# EAGLE board Stick IMUinator (EAGLE 5.11)
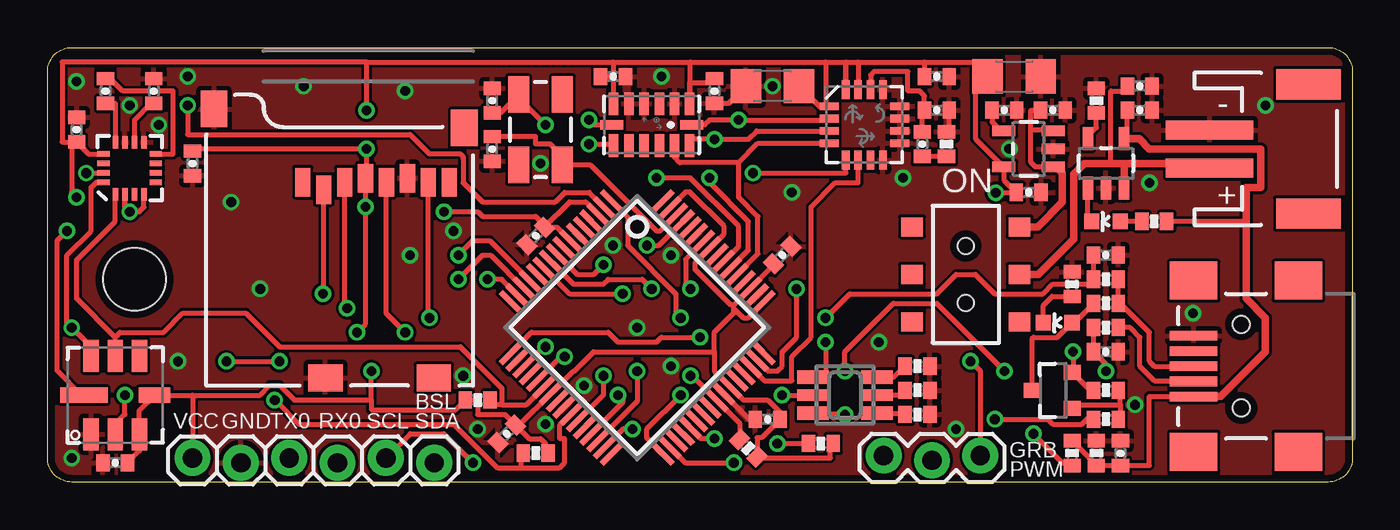
[diagram p0: board, top side]
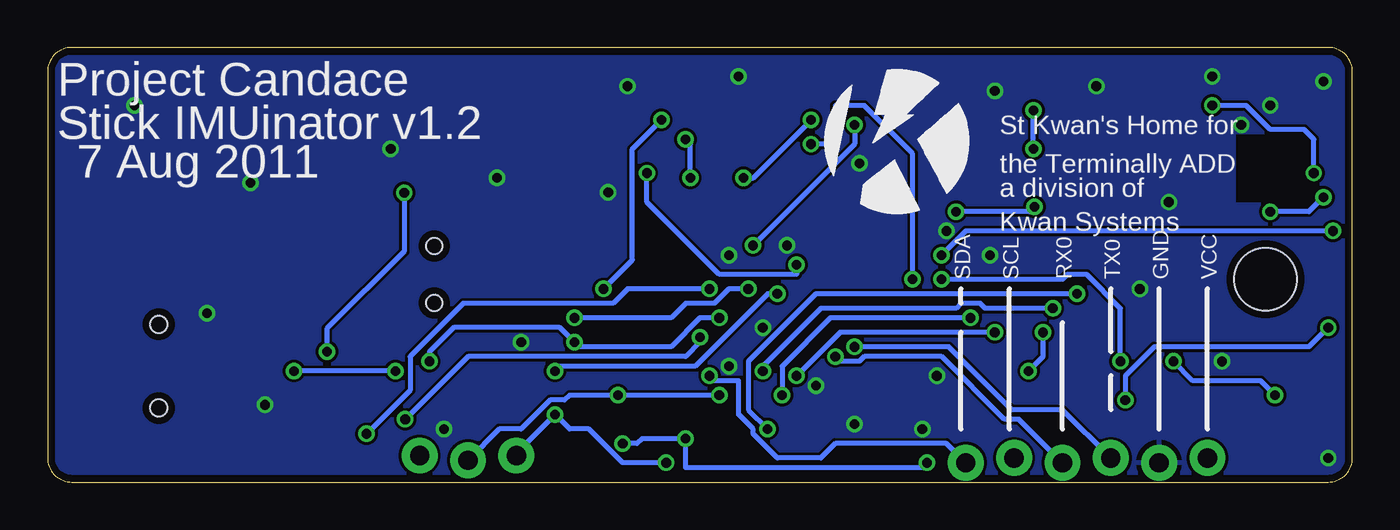
[diagram p1: board, bottom side, seen from below]

Size 68.58 x 22.86 mm. Coordinates in mm from the lower left corner, seen from the top.
Outline: 1.27,22.86 67.31,22.86 arc-90 68.58,21.59 68.58,1.27 arc-90 67.31,0 1.27,0 arc-90 0,1.27 0,21.59 arc-90 1.27,22.86
Copper layers (1*16): Top 0.0356mm / dielectric 1.5011mm / Bottom 0.0356mm
Design rules "LaenPCBOrder *": minimum track width 6mil, minimum drill 13mil, track to track 6mil, track to pad 6mil, pad to pad 6mil, via to via 6mil, smd to smd 6mil, copper to edge 15mil, drill to drill 6mil, minimum pad ring 7mil, minimum via ring 7mil, stop-mask expansion 4mil, vias tented up to drill 0mil, thermal gap 10mil
Net classes: 0 default: width 0.152 mm, drill 0.33 mm, clearance 0.152 mm; 1 power: width 0.152 mm, drill 0.33 mm, clearance 0.152 mm to class 0, clearance 0.152 mm; 2 hv: width 0.152 mm, drill 0.33 mm, clearance 0.152 mm to class 0, clearance 0.152 mm to class 1, clearance 0.152 mm
tRestrict: area 2.5,14.7 to 6.1,17.5; area 2.5,17.5 to 3.8,18.3; area 5.6,17.5 to 6.1,18.3
bRestrict: area 2.5,14.7 to 6.1,18.3

## Footprints (pad centres in the part's own frame; a part is rotated, then mirrored left to right if it is on the bottom)
0402-CAP = smd 0.7 x 0.9: 1 -0.65,0; 2 0.65,0
1206 = smd 1.6 x 1.8: 1 -1.4,0; 2 1.4,0
LED-0603 = smd 0.8 x 0.8: A 0,-0.75; C 0,0.75
GM5WA94310A = smd 0.7 x 1.65: 1 -0.95,-1.675; 3 0.95,-1.675; 4 0.95,1.675; 6 -0.95,1.675 | smd 0.6 x 1.65: 2 0,-1.675; 5 0,1.675
USB-MINIB = smd 2.5 x 0.5: D+ 2.5,0; D- 2.5,0.8; GND 2.5,-1.6; ID 2.5,-0.8; VBUS 2.5,1.6 | smd 2.5 x 2: MTN1 -3,4.5; MTN2 2.5,4.5; MTN3 -3,-4.5; MTN4 2.5,-4.5 | hole 0.9: 0,2.2; 0,-2.2
JST-2-SMD = smd 1 x 4.6: 1 -1,-3.7; 2 1,-3.7 | smd 1.6 x 3.4: NC1 -3.4,1.5; NC2 3.4,1.5
1X06_LOCK = drill 1.016 pad 1.88 round: 1 0,0; 2 2.54,-0.254; 3 5.08,0; 4 7.62,-0.254; 5 10.16,0; 6 12.7,-0.254
1X03_LOCK = drill 1.016 pad 1.88 round: 1 0,0.127; 2 2.54,-0.127; 3 5.08,0.127
STAND-OFF = hole 3.302: 0,0
SOT23-3 = smd 0.8 x 0.9: 1 -0.95,-1; 2 0.95,-1; 3 0,1.1
0402-RES = smd 0.7 x 0.9: 1 -0.65,0; 2 0.65,0
AYZ0202 = smd 1 x 1.15: 1 -2.5,2.825; 2 0,2.825; 3 2.5,2.825; 4 -2.5,-2.825; 5 0,-2.825; 6 2.5,-2.825 | hole 0.85: 1.5,0; -1.5,0
BMP085 = smd 1.67 x 0.8: 1 -2.065,1.27; 2 -2.065,0; 3 -2.065,-1.27; 5 2.065,-1.27; 6 2.065,0; 7 2.065,1.27 | smd 0.8 x 1.67: 4 0,-2.065 | smd 0.8 x 2.5: 8 0,1.65
SOT23-5 = smd 0.55 x 1.2: 1 -0.95,-1.3; 2 0,-1.3; 3 0.95,-1.3; 4 0.95,1.3; 5 -0.95,1.3
SQFP-S-10X10-64 = smd 0.3 x 1.6: 1 -3.75,-5.6; 2 -3.25,-5.6; 3 -2.75,-5.6; 4 -2.25,-5.6; 5 -1.75,-5.6; 6 -1.25,-5.6; 7 -0.75,-5.6; 8 -0.25,-5.6; 9 0.25,-5.6; 10 0.75,-5.6; 11 1.25,-5.6; 12 1.75,-5.6; 13 2.25,-5.6; 14 2.75,-5.6; 15 3.25,-5.6; 16 3.75,-5.6; 33 3.75,5.6; 34 3.25,5.6; 35 2.75,5.6; 36 2.25,5.6; 37 1.75,5.6; 38 1.25,5.6; 39 0.75,5.6; 40 0.25,5.6; 41 -0.25,5.6; 42 -0.75,5.6; 43 -1.25,5.6; 44 -1.75,5.6; 45 -2.25,5.6; 46 -2.75,5.6; 47 -3.25,5.6; 48 -3.75,5.6 | smd 1.6 x 0.3: 17 5.6,-3.75; 18 5.6,-3.25; 19 5.6,-2.75; 20 5.6,-2.25; 21 5.6,-1.75; 22 5.6,-1.25; 23 5.6,-0.75; 24 5.6,-0.25; 25 5.6,0.25; 26 5.6,0.75; 27 5.6,1.25; 28 5.6,1.75; 29 5.6,2.25; 30 5.6,2.75; 31 5.6,3.25; 32 5.6,3.75; 49 -5.6,3.75; 50 -5.6,3.25; 51 -5.6,2.75; 52 -5.6,2.25; 53 -5.6,1.75; 54 -5.6,1.25; 55 -5.6,0.75; 56 -5.6,0.25; 57 -5.6,-0.25; 58 -5.6,-0.75; 59 -5.6,-1.25; 60 -5.6,-1.75; 61 -5.6,-2.25; 62 -5.6,-2.75; 63 -5.6,-3.25; 64 -5.6,-3.75
LGA16-4X4 = smd 1 x 0.4: 1 -1.85,0.975; 2 -1.85,0.325; 3 -1.85,-0.325; 4 -1.85,-0.975; 9 1.85,-0.975; 10 1.85,-0.325; 11 1.85,0.325; 12 1.85,0.975 | smd 0.4 x 1: 5 -0.975,-1.85; 6 -0.325,-1.85; 7 0.325,-1.85; 8 0.975,-1.85; 13 0.975,1.85; 14 0.325,1.85; 15 -0.325,1.85; 16 -0.975,1.85
LGA14 = smd 0.5 x 1.2: 1 2,1.1; 2 1.2,1.1; 3 0.4,1.1; 4 -0.4,1.1; 5 -1.2,1.1; 6 -2,1.1; 8 -2,-1.1; 9 -1.2,-1.1; 10 -0.4,-1.1; 11 0.4,-1.1; 12 1.2,-1.1; 13 2,-1.1 | smd 1.2 x 0.5: 7 -2.1,0; 14 2.1,0
MICRO-SD-SOCKET-PP = smd 0.8 x 1.5: 1 -8.94,10.7; 2 -7.84,10.3; 3 -6.74,10.7; 4 -5.64,10.9; 5 -4.54,10.7; 6 -3.44,10.9; 7 -2.34,10.7; 8 -1.24,10.7 | smd 1.8 x 1.4: CD1 -2.05,0.4; CD2 -7.75,0.4 | smd 1.4 x 1.9: GND1 -13.6,14.55; GND3 -0.45,13.55
16LPCC = smd 0.65 x 0.28: 1 -1.37,0.75; 2 -1.37,0.25; 3 -1.37,-0.25; 4 -1.37,-0.75; 9 1.37,-0.75; 10 1.37,-0.25; 11 1.37,0.25; 12 1.37,0.75 | smd 0.28 x 0.65: 5 -0.75,-1.37; 6 -0.25,-1.37; 7 0.25,-1.37; 8 0.75,-1.37; 13 0.75,1.37; 14 0.25,1.37; 15 -0.25,1.37; 16 -0.75,1.37
CRYSTAL-SMD-5X3 = smd 1.9 x 1.1: 1 -1.85,-1.15; 2 1.85,-1.15; 3 1.85,1.15; 4 -1.85,1.15

## Placement (x,y rotation side)
C002  0.1uF  [0402-CAP]  56.39,1.52 90 top
C003  22pF  [0402-CAP]  55.63,11.94 0 top
C004  22pF  [0402-CAP]  55.63,6.86 0 top
C101  0.1uF  [0402-CAP]  3.56,1.02 180 top
C201  10uF  [1206]  50.8,21.34 0 top
C202  0.1uF  [0402-CAP]  51.56,15.24 0 top
C203  0.1uF  [0402-CAP]  50.29,19.56 0 top
C204  4.7uF  [0402-CAP]  52.83,19.56 0 top
C301  4.7uF  [0402-CAP]  57.4,20.83 0 top
C302  4.7uF  [0402-CAP]  57.4,19.56 0 top
C407  0.1uF  [0402-CAP]  25.65,12.95 225 top
C423  0.1uF  [0402-CAP]  24.13,2.54 225 top
C443  0.1uF  [0402-CAP]  37.85,3.3 180 top
C451  0.1uF  [0402-CAP]  38.61,11.94 45 top
C461  22pF  [0402-CAP]  23.37,20.07 270 top
C462  22pF  [0402-CAP]  23.37,17.53 90 top
C501  0.1uF  [0402-CAP]  46.74,21.34 0 top
C502  10uF  [1206]  38.1,20.83 180 top
C503  0.01uF  [0402-CAP]  46.74,19.56 0 top
C504  0.47uF  [0402-CAP]  45.97,17.78 270 top
C601  0.1uF  [0402-CAP]  35.05,20.57 270 top
C606  4.7uF  [0402-CAP]  29.72,21.34 0 top
C701  0.1uF  [0402-CAP]  7.62,16.76 270 top
C802  0.1uF  [0402-CAP]  1.52,18.54 90 top
C808  0.22uF  [0402-CAP]  3.05,20.57 270 top
C810  4.7uF  [0402-CAP]  5.59,20.57 90 top
D002  RED  [LED-0603]  53.09,8.38 90 top
D301  GREEN  [LED-0603]  55.63,13.72 90 top
D401  GM5WA94310A  [GM5WA94310A]  41.91,4.57 270 top
J001  USBSMD  [USB-MINIB]  62.74,6.1 180 top
J301  JST 2mm  [JST-2-SMD]  64.77,17.53 270 top
J401  M06  [1X06_LOCK]  7.62,1.27 0 top
J402  M03  [1X03_LOCK]  43.94,1.27 0 top
JP1  STAND-OFF  [STAND-OFF]  4.57,10.67 0 top
Q001  PNP  [SOT23-3]  52.86,4.83 90 top
R008  10k  [0402-RES]  53.85,1.52 90 top
R009  33  [0402-RES]  55.63,10.67 0 top
R010  33  [0402-RES]  55.63,8.13 0 top
R011  1.5k  [0402-RES]  55.63,9.4 0 top
R012  1k  [0402-RES]  55.63,3.3 0 top
R013  10k  [0402-RES]  55.63,4.83 180 top
R014  100k  [0402-RES]  55.12,1.52 270 top
R015  330  [0402-RES]  53.85,10.41 270 top
R301  2.2k  [0402-RES]  55.12,20.07 270 top
R302  330  [0402-RES]  58.17,13.72 0 top
R404  47  [0402-RES]  45.72,4.83 180 top
R405  4.7  [0402-RES]  45.72,3.56 180 top
R406  10  [0402-RES]  45.72,6.1 180 top
R422  10k  [0402-RES]  22.61,4.32 180 top
R426  10k  [0402-RES]  25.65,1.52 0 top
R437  10k  [0402-RES]  40.64,2.03 0 top
R441  10k  [0402-RES]  36.83,1.78 315 top
R501  10k  [0402-RES]  47.24,17.78 270 top
S201  SPST  [AYZ0202]  48.26,10.92 270 top
U101  BMP085  [BMP085]  3.56,4.57 90 top
U201  V_REG  [SOT23-5]  51.56,17.53 90 top
U301  73831  [SOT23-5]  55.63,16.76 0 top
U401  LPC2148  [SQFP-S-10X10-64]  30.99,8.13 225 top
U501  L3G4200D  [LGA16-4X4]  42.93,18.8 0 top
U601  ADXL345  [LGA14]  31.75,18.8 0 top
U701  USD-SOCKETNEW  [MICRO-SD-SOCKET-PP]  22.35,5.08 0 top
U801  5883  [16LPCC]  4.32,16.51 90 top
Y401  12MHz  [CRYSTAL-SMD-5X3]  25.91,18.54 270 top

## Library data of the parts
C002-C004 C101 C201-C204 C301 C302 C407 C423 C443 C451 C461 C462 C501-C504 C601 C606 C701 C802 C808 C810 D002 D301 J001 J301 J401 J402 JP1 Q001 R008 R009 R010-R015 R301 R302 R404-R406 R422 R426 R437 R441 R501 S201 U101 U201 U301 U401 U501 U601 U701 U801 Y401 = SparkFun
D401 = led

## Nets
ACCINT: U401.15 U601.8
COMPINT: U401.2 U801.15
CS0: U401.31 U701.2
CSA: U401.55 U601.7
CSG: U401.9 U501.5
EOC: U101.2 U401.14
GND [power]: C002.2 C003.2 C004.2 C101.2 C201.2 C202.2 C203.2 C204.2 C301.2 C302.2 C407.2 C423.2 C443.2 C451.2 C461.1 C462.1 C501.2 C502.2 C503.2 C601.2 C606.2 C701.2 C802.2 C810.2 J001.GND J301.1 J401.2 R014.1 R015.1 R301.1 R404.1 R405.1 R406.1 R501.1 U101.1 U201.2 U301.2 U401.6 U401.18 U401.25 U401.42 U401.50 U401.59 U501.8 U501.9 U501.10 U501.11 U501.12 U501.13 U601.2 U601.4 U601.5 U701.6 U701.CD2 U701.GND1 U801.9 U801.11
GYROINT: U401.46 U501.6
MISO0: U401.29 U701.7
MISO1: U401.53 U501.4 U601.12
MOSI0: U401.30 U701.3
MOSI1: U401.54 U501.3 U601.13
N$1: J001.D- R010.2
N$2: R301.2 U301.5
N$3: J001.D+ R009.2 R011.2
N$4: D301.C U301.1
N$5: D301.A R302.1
N$6: D002.A Q001.3 R011.1
N$7: D002.C R015.2
N$9: Q001.1 R012.2 R013.1
N$11: D401.5 R404.2
N$12: D401.6 R406.2
N$13: D401.4 R405.2
N$14: C808.1 U801.8
N$15: C808.2 U801.12
N$16: C810.1 U801.10
N$17: C203.1 U201.4
N$20: C503.1 C504.1 U501.14
N$21: C504.2 R501.2
PWMB: D401.1 J402.3 U401.1
PWMG: D401.3 J402.1 U401.34
PWMR: D401.2 J402.2 U401.33
RAW: C204.1 S201.1 U201.1 U201.3
RX0: J401.4 U401.21
SCK0: U401.27 U701.5
SCK1: U401.47 U501.2 U601.14
SCL0: R422.1 U101.6 U401.22 U801.1
SCL1: J401.5 R437.1 U401.37
SDA0: R426.1 U101.7 U401.26 U801.16
SDA1: J401.6 R441.1 U401.41
TX0: J401.3 U401.19
USB_LIGHT: R012.1 U401.17
USB_ON: R008.1 U401.58
USB_VIN: C002.1 C302.1 J001.VBUS R008.2 R014.2 R302.2 U301.4
USBD+: C003.1 R009.1 U401.10
USBD-: C004.1 R010.1 U401.11
VCC [power]: C101.1 C201.1 C202.1 C407.1 C423.1 C443.1 C451.1 C501.1 C502.1 C601.1 C606.1 C701.1 C802.1 J401.1 Q001.2 R013.2 R422.2 R426.2 R437.2 R441.2 U101.3 U101.4 U201.5 U401.3 U401.7 U401.23 U401.43 U401.49 U401.51 U401.57 U401.63 U501.1 U501.15 U501.16 U601.1 U601.6 U701.4 U801.2 U801.4 U801.13
VLIPO: C301.1 J301.2 S201.2 U301.3
XCLR: U101.8 U401.13
XTAL1: C462.2 U401.62 Y401.3
XTAL2: C461.2 U401.61 Y401.1

## Tracks (layer width: path | path; a pad name or v marks a point on that pad's centre or on a via)
ACCINT  (via drill 0.51)
  Top 0.254: U401.15 23.88,10.64 23.88,10.67 v23.11,10.67 | U601.8 29.67,17.78 v28.45,17.78
  Bottom 0.254: v28.45,17.78 27.69,17.78 27.18,18.29 27.18,19.81 25.65,19.81 23.11,17.27 v23.11,10.67
COMPINT  (via drill 0.51)
  Top 0.254: U801.15 v2.04,16.26 v2.03,16.26 | U401.2 28.47,15.24 27.18,15.24 26.67,14.73 22.86,14.73 21.84,15.75 21.84,17.02 arc90 21.59,17.27 20.07,17.27 19.05,18.29 7.37,18.29 v7.37,19.81
  Bottom 0.254: v2.03,16.26 2.03,18.03 2.54,18.54 4.32,18.54 5.59,19.81 v7.37,19.81
CS0  (via drill 0.51)
  Top 0.254: U401.31 30.25,2.79 v30.73,2.79 | U701.2 14.51,9.94 v14.48,9.91
  Bottom 0.254: v14.48,9.91 28.19,9.91 31.75,6.35 31.75,3.81 v30.73,2.79
CSA  (via drill 0.51)
  Top 0.254: v32,16 33.78,16 36.32,13.46 36.32,12.4 U401.55 | U601.7 28.7,18.8 v28.45,19.05
  Bottom 0.254: v28.45,19.05 31.5,16 v32,16
CSG  (via drill 0.51)
  Top 0.254: U401.9 27.84,10.92 28.7,10.92 v29.21,11.43 | U501.5 41.95,16.26 v37.08,16.26
  Bottom 0.254: v29.21,11.43 29.21,10.92 33.27,10.92 37.08,14.73 v37.08,16.26
EOC  (via drill 0.51)
  Top 0.254: U401.14 23.29,11.94 22.86,11.94 v21.59,10.67 | U101.2 3.56,3.05 4.06,3.56 v4.06,4.57 | v9.4,6.35 v12.19,6.35
  Bottom 0.254: v21.59,10.67 15.24,10.67 14.99,10.92 13.97,10.92 12.19,9.14 v12.19,6.35 | v4.06,4.57 4.83,5.33 8.38,5.33 v9.4,6.35
GND  (via drill 0.51)
  Top 0.254: R501.1 47.39,18.57 C503.2 | C601.2 35.8,19.92 C502.2 | 36.41,3.76 U401.42 36.88,3.3 C443.2
  other vias: 64.01,19.81 60.2,8.89 57.15,4.06 4.32,19.81 11.18,10.16 5.84,18.8 1.52,21.08 39.12,15.24 44.96,16 47.75,2.79 30.99,8.13 32.26,21.34 32.77,6.1 21.34,13.21 32.77,11.94 26.16,3.05 9.65,14.73 13.46,20.83 29.72,12.45 38.1,20.83 7.37,21.34 18.8,20.57 25.91,16.76 6.86,6.35 28.19,5.08 43.69,7.37 19.05,11.94 22.61,2.79 50.55,17.53 21.84,5.59 1.27,1.27 57.91,15.75
  pour Top: 1.27,22.86 67.31,22.86 arc-90 68.58,21.59 68.58,1.27 arc-90 67.31,0 1.27,0 arc-90 0,1.27 0,21.59 arc-90
  pour Bottom: 1.27,22.86 67.31,22.86 arc-90 68.58,21.59 68.58,1.27 arc-90 67.31,0 1.27,0 arc-90 0,1.27 0,21.59 arc-90
GYROINT
  Top 0.254: U401.46 37.67,5.33 39.12,5.33 39.12,6.6 40.13,7.62 40.13,14.48 41.4,15.75 42.6,15.75 U501.6
MISO0  (via drill 0.51)
  Top 0.254: U401.29 30.23,4.18 30.23,4.32 v29.97,4.57 | U701.7 20.01,8.69 v20.07,8.64
  Bottom 0.254: v20.07,8.64 27.43,8.64 29.97,6.1 v29.97,4.57
MISO1
  Top 0.254: U601.12 32.95,17.09 33.23,16.8 36.32,16.8 | U401.53 37.34,12 37.34,13.97 36.32,14.99 36.32,16.8 | U501.4 37.34,17.82 36.32,16.8
MOSI0  (via drill 0.51)
  Top 0.254: v30.99,5.84 30.99,4.24 U401.30 | U701.3 15.61,9.28 v15.75,9.14
  Bottom 0.254: v30.99,5.84 30.99,6.1 27.94,9.14 20.83,9.14 20.57,9.4 19.56,9.4 19.3,9.14 v15.75,9.14
MOSI1  (via drill 0.51)
  Top 0.254: U601.13 33.75,18.03 v35.05,18.03 36.83,18.03 37.27,18.47 U501.3 | U401.54 36.83,12.2 36.83,13.72 34.8,15.75 v34.8,16
  Bottom 0.254: v34.8,16 34.8,17.78 v35.05,18.03
N$1
  Top 0.254: R010.2 56.9,8.13 57.4,7.62 57.4,6.1 58.17,5.33 60.2,5.33 J001.D-
N$2
  Top 0.254: U301.5 54.61,18.13 55.12,18.64 R301.2
N$3
  Top 0.254: R009.2 R011.2 56.39,9.4 57.91,7.87 57.91,6.35 58.17,6.1 J001.D+
N$4
  Top 0.254: U301.1 54.68,13.72 D301.C
N$5
  Top 0.254: R302.1 D301.A
N$6
  Top 0.254: R011.1 53.96,8.38 D002.A 53.07,7.62 51.82,7.62 51.76,7.56 Q001.3
N$7
  Top 0.254: D002.C 52.34,9.3 52.8,9.76 R015.2
N$9
  Top 0.254: R013.1 56.28,4.94 56.39,4.83 56.39,4.06 | R012.2 56.39,3.3 56.39,4.06 | 56.39,4.06 53.77,4.06 53.86,3.97 Q001.1
N$11
  Top 0.254: D401.5 44.82,4.57 R404.2
N$12
  Top 0.254: D401.6 44.5,5.52 R406.2
N$13
  Top 0.254: D401.4 45,3.62 R405.2
N$14
  Top 0.254: U801.8 6.6,17.26 6.6,20.57 3.95,20.57 3.3,21.22 C808.1
N$15
  Top 0.254: C808.2 3.57,19.92 U801.12
N$16
  Top 0.254: U801.10 4.57,19.05 5.45,19.92 C810.1
N$17
  Top 0.254: C203.1 49.64,18.94 50.04,18.54 50.2,18.54 U201.4
N$20
  Top 0.254: C504.1 45.97,19.45 C503.1 46.09,20.32 45.83,20.57 45.21,20.57 45.21,21.59 43.43,21.59 43.25,21.41 U501.14
N$21
  Top 0.254: R501.2 C504.2
PWMB  (via drill 0.51)
  Top 0.254: D401.1 40.64,5.52 arc90 40.89,5.78 v40.89,7.37 | v33.27,8.64 33.02,8.89 33.02,9.91 30.48,12.45 30.48,13.94 U401.1 | v48.51,6.35 49.02,5.84 J402.3
  Bottom 0.254: v33.27,8.64 34.29,8.64 35.81,7.11 40.64,7.11 v40.89,7.37 41.66,8.13 47.24,8.13 48.51,6.86 v48.51,6.35 | J402.3 49.02,1.27
PWMG  (via drill 0.51)
  Top 0.254: U401.34 33.5,1.02 v36.07,1.02 | D401.3 40.3,3.56 v41.91,3.56
  Bottom 0.254: v36.07,1.02 38.35,1.02 40.13,2.79 41.15,2.79 v41.91,3.56 43.94,1.52 J402.1 43.94,1.27
PWMR  (via drill 0.51)
  Top 0.254: 31.75,2.03 32.27,1.52 U401.33 31.5,2.32 31.5,2.79 v33.27,4.57 | v38.61,4.57 D401.2
  Bottom 0.254: v33.27,4.57 v38.61,4.57 41.15,4.57 41.4,4.32 42.16,4.32 43.69,2.79 44.83,2.79 J402.2
RAW
  Top 0.254: 51.67,18.54 51.67,16.83 51.93,16.58 U201.1 | 51.67,18.54 51.67,19.56 C204.1 | U201.3 52.8,18.54 51.67,18.54
  Top 0.406: S201.1 52.03,13.42 53.34,14.73 53.34,16.26 53.02,16.58 U201.1
RX0  (via drill 0.51)
  Top 0.254: U401.21 26.99,6.6 v27.18,6.6
  Bottom 0.254: v27.18,6.6 26.92,6.35 25.91,6.35 25.65,6.6 21.59,6.6 18.29,3.3 17.53,3.3 J401.4
SCK0  (via drill 0.51)
  Top 0.254: v29.21,5.59 29.21,4.58 U401.27 | v18.8,7.87 17.81,8.86 U701.5
  Bottom 0.254: v18.8,7.87 26.92,7.87 v29.21,5.59
SCK1  (via drill 0.51)
  Top 0.254: v39.37,10.16 39.37,7.62 38.61,6.86 38.61,6.1 38.35,5.84 37.87,5.84 U401.47 | U501.2 41.01,19.05 v36.32,19.05 34.8,19.05 34.54,18.8 U601.14
  Bottom 0.254: v39.37,10.16 37.85,11.68 37.85,17.53 v36.32,19.05
SCL0
  Top 0.254: U401.22 25.16,4.06 23.88,4.06 | U801.1 3.56,15.13 3.56,13.72 1.52,11.68 1.52,9.65 3.56,7.62 | 23.88,4.06 23.88,4.94 21.7,7.11 12.19,7.11 10.41,8.89 7.11,8.89 6.1,7.87 3.81,7.87 3.56,7.62 | 23.88,4.06 23.51,4.06 arc-90 R422.1 | U101.6 3.56,7.62
SCL1  (via drill 0.51)
  Top 0.254: v22.35,1.02 20.83,2.54 19.05,2.54 J401.5 | v35.05,2.29 34.35,2.29 U401.37 | v38.35,2.03 R437.1
  Bottom 0.254: v22.35,1.02 22.61,0.76 35.05,0.76 v35.05,2.29 37.34,2.29 37.59,2.03 v38.35,2.03
SDA0  (via drill 0.51)
  Top 0.254: U801.16 2.55,15.76 2.29,15.49 2.29,13.21 1.02,11.94 1.02,8.38 v1.27,8.13 2.29,7.11 U101.7 | U401.26 26.92,3 26.92,2.29 27.18,2.29 27.18,1.02 26.92,0.76 24.89,0.76 | v11.94,4.32 13.21,3.05 21.34,3.05 23.62,0.76 24.89,0.76 | R426.1 24.89,1.41 24.89,0.76
  Bottom 0.254: v11.94,4.32 11.94,5.59 10.41,7.11 2.29,7.11 v1.27,8.13
SDA1  (via drill 0.51)
  Top 0.254: R441.1 36.37,3.1 U401.41 33.88,5.59 v33.78,5.59
  Bottom 0.254: v33.78,5.59 33.53,5.33 32.26,5.33 32.26,3.56 31.5,2.79 31.5,2.54 30.23,1.27 27.94,1.27 27.18,2.03 21.34,2.03 J401.6
TX0  (via drill 0.51)
  Top 0.254: U401.19 26.08,7.11 v26.16,7.11
  Bottom 0.254: v26.16,7.11 21.21,7.11 17.91,3.81 15.24,3.81 J401.3
USB_LIGHT  (via drill 0.51)
  Top 0.254: R012.1 54.61,3.3 54.36,3.05 52.83,3.05 52.58,3.3 v49.78,3.3 | v34.29,7.62 32.26,7.62 32,7.37 29.97,7.37 29.46,7.87 25.43,7.87 U401.17
  Bottom 0.254: v34.29,7.62 34.29,7.37 35.05,6.6 46.48,6.6 v49.78,3.3
USB_ON  (via drill 0.51)
  Top 0.254: v51.82,2.54 53.34,1.02 53.71,1.02 R008.1 | v33.78,10.16 33.53,10.41 33.53,11.73 U401.58
  Bottom 0.254: v51.82,2.54 49.53,4.83 49.53,6.6 46.74,9.4 38.86,9.4 38.1,10.16 v33.78,10.16
USB_VIN
  Top 0.254: R008.2 55.12,0.9 R014.2 C002.1 57.91,0.87 57.91,4.5 J001.VBUS | U301.4 56.5,18.14 56.75,18.14 C302.1 | 62.99,13.72 R302.2
  Top 0.406: J001.VBUS 61.65,4.5 64.01,6.86 64.01,8.64 62.99,9.65 62.99,13.72 62.99,15.49 63.75,15.49 63.75,17.53 57.91,17.53 57.37,18.06 U301.4
USBD+  (via drill 0.51)
  Top 0.254: R009.1 55.01,10.67 | R009.1 55.12,10.67 | 26.54,11.56 U401.10 27.64,10.41 29.21,10.41 29.46,10.67 31.24,10.67 v31.75,10.16 | R009.1 C003.1 | v40.89,8.64 42.16,9.91 46.74,9.91 47.75,10.92 48.77,10.92 49.78,9.91 52.32,9.91 52.83,10.41 54.72,10.41 R009.1 | R009.1 54.98,10.41
  Bottom 0.254: v31.75,10.16 32.77,10.16 33.53,9.4 35.05,9.4 35.81,8.64 v40.89,8.64
USBD-  (via drill 0.51)
  Top 0.254: v55.63,5.84 55.63,6.21 C004.1 R010.1 | v30.23,9.91 27.44,9.91 U401.11 | v41.91,5.84 41.91,6.86 44.45,9.4 46.74,9.4 v50.29,5.84
  Bottom 0.254: v50.29,5.84 v55.63,5.84 | v30.23,9.91 30.73,9.91 34.54,6.1 41.91,6.1 v41.91,5.84
VCC  (via drill 0.51)
  Top 0.254: 54.98,4.89 R013.2 54.81,4.83 Q001.2 53.9,5.78 v53.9,6.86 | 4.07,14.48 U801.2 4.07,14.47 v4.32,14.22 4.83,14.22 5.07,14.47 U801.4 5.08,15.13 | C802.1 2.16,17.26 U801.13 | v1.52,14.99 1.27,15.24 1.27,17.64 C802.1 | C451.1 38.15,11.4 U401.51 36.07,9.32 | U401.7 26.76,13.41 C407.1 | U401.49 37.6,9.4 36.83,8.64 36.58,8.64 36.07,9.14 | 36.07,9.14 36.07,9.32 | U401.63 33.53,15.26 33.76,15.26 35.56,13.46 35.56,13.05 U401.57 34.04,11.53 34.04,11.18 35.89,9.32 36.07,9.32 | C407.1 27.43,14.73 28.27,14.73 U401.3 | U401.43 35.05,5.83 35.05,6.86 | 36.07,9.14 36.07,8.89 35.05,7.87 35.05,6.86 | 41.95,22.06 U501.16 41.95,22.1 | 40.89,22.1 40.89,19.81 40.85,19.77 U501.1 40.56,19.77 C502.1 39.37,20.96 | 29.72,22.1 33.78,22.1 | 33.78,22.1 40.89,22.1 | C601.1 34.83,21 33.75,21 U601.1 33.75,22.07 33.78,22.1 | 29.72,22.1 29.72,21.34 | 35.05,6.86 28.7,6.86 27.68,5.83 27.63,5.83 U401.23 24.8,3 C423.1 | 16.76,22.1 29.72,22.1 | 16.76,22.1 0.76,22.1 0.76,17.89 C802.1 | v16.76,19.56 16.76,22.1 | 41.95,22.1 42.6,22.1 | 40.89,22.1 41.95,22.1 | 42.6,22.1 U501.15 | 46.09,22.1 C501.1 | 42.6,22.1 46.09,22.1 | R441.2 | R426.2 26.16,1.52 26.16,2.03 25.91,2.29 25.3,2.29 C423.1 | v16.26,7.87 16.71,8.33 v16.71,14.48 U701.4 16.76,15.98 v16.76,17.53 | C407.1 26.11,13.51 25.65,13.97 22.86,13.97 22.61,14.22 v20.83,14.22 | 41.15,2.17 41.15,2.29 | 41.15,2.17 R437.2 | 41.15,2.17 41.15,1.27 37.34,1.27 R441.2 | U401.43 35.84,5.05 | U401.43 36.57,4.32 37.85,4.32 38.5,3.67 C443.1 37.53,2.33 37.29,2.33 R441.2 | 29.72,21.34 C606.1 | 29.72,21.34 29.72,19.93 U601.6 | v16.76,17.53 16.76,17.56 | 17.02,4.32 v17.02,5.84 | 17.02,4.32 17.02,3.81 21.45,3.81 R422.2 22.61,4.32 22.61,3.56 24.03,3.56 C423.1
  Top 0.254: 17.02,4.32 12.95,4.32 12.19,5.08 11.68,5.08 11.18,4.57 7.62,4.57 | C101.1 4.83,1.64 U101.3 4.83,3.78 U101.4 7.62,4.57 | 7.62,4.57 J401.1 | 46.09,22.1 49.53,22.1 49.53,21.47 arc-90 C201.1 arc90 49.02,20.96 49.02,20.83 48.77,20.57 48.77,18.07 U201.5 50.26,15.89 C202.1 arc-90 50.89,15.21 v49.84,15.21 | C701.1 7.73,17.53 v16.76,17.53
  Bottom 0.254: v4.32,14.22 2.29,14.22 v1.52,14.99 | v16.76,17.53 v16.76,19.56 | v16.26,7.87 16.26,6.6 v17.02,5.84 | v16.71,14.48 16.97,14.22 v20.83,14.22 | v53.9,6.86 53.9,8.08 49.84,12.14 v49.84,15.21
VLIPO
  Top 0.254: 55.88,16.76 55.88,20.57 56.75,20.57 C301.1 | 60.83,16.76 arc-90 J301.2 | 56.64,16.76 arc90 56.58,16.7
  Top 0.406: 60.83,16.76 56.64,16.76 55.88,16.76 54.48,16.76 53.92,16.2 53.92,12.78 52.07,10.92 S201.2 | 56.58,16.7 U301.3
XCLR  (via drill 0.51)
  Top 0.254: U401.13 23.23,12.7 22.35,12.7 v21.59,11.94 | v1.02,13.21 0.51,12.7 0.51,5.87 1.8,4.57 U101.8
  Bottom 0.254: v21.59,11.94 20.32,13.21 v1.02,13.21
XTAL1
  Top 0.254: 32.43,13.46 U401.62 32.18,13.21 32,13.21 28.52,16.69 Y401.3 26.92,16.83 26.92,17.27 26.42,17.78 25.65,17.78 25.65,18.18 C462.2
XTAL2  (via drill 0.51)
  Top 0.254: Y401.1 24.76,20.72 | Y401.1 24.76,20.2 v26.16,18.8 | v31.5,12.45 32.12,12.45 U401.61 | C461.2 23.78,19.42 Y401.1
  Bottom 0.254: v26.16,18.8 26.16,17.78 v31.5,12.45

## Text on the board
tPlace: - | ON | + | BSL | VCC | GND | TX0 | RX0 | SCL | SDA | GRB | PWM
bPlace: Project Candace | St Kwan's Home for | Stick IMUinator v1.2 | the Terminally ADD | 7 Aug 2011 | a division of | Kwan Systems | VCC | GND | TX0 | RX0 | SCL | SDA
tValues: Horizontal JST
tDocu: BYP 4 | 3 EN | VOUT 5 | 1 VIN | 2 GND | 5 PROG | 4 VDD | STAT 1 | VBAT 3 | VSS 2 | GND | NC | 7 SDA | 6 SCL | 5 NC | D+ | D- | 8 XCLR | 4 VDD | VBus | 1 GND | 2 EOC | 3 VDDA